# EAGLE board USB_Type_A_Female_Breakout-Panel-v10 (EAGLE 6.6.0)
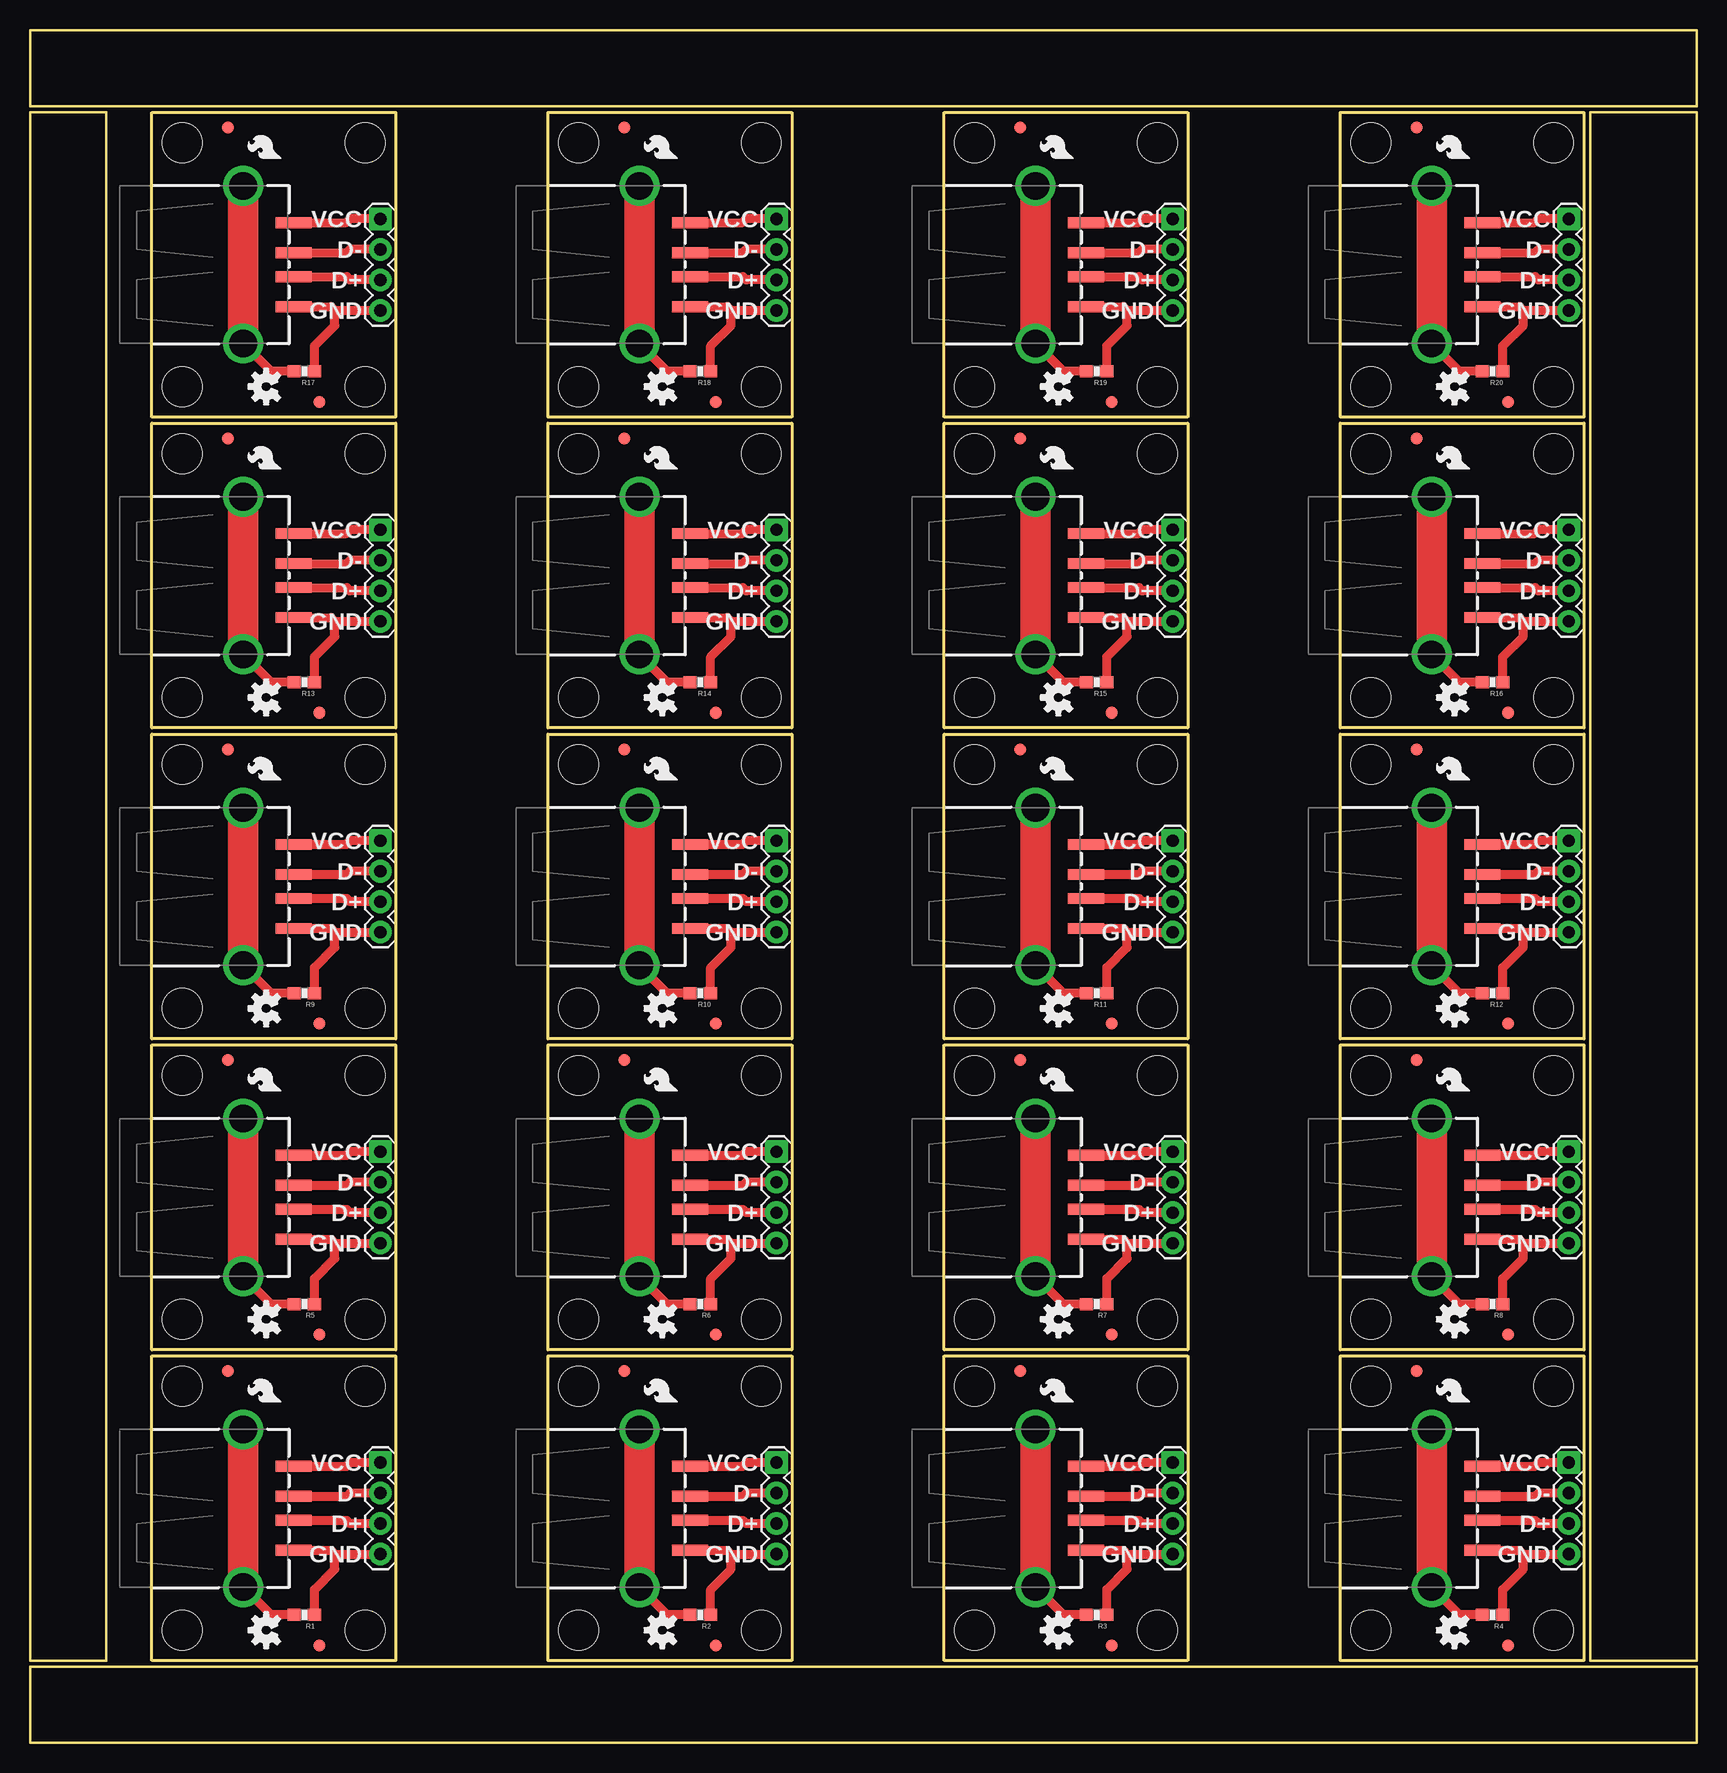
[diagram p0: board, top side]
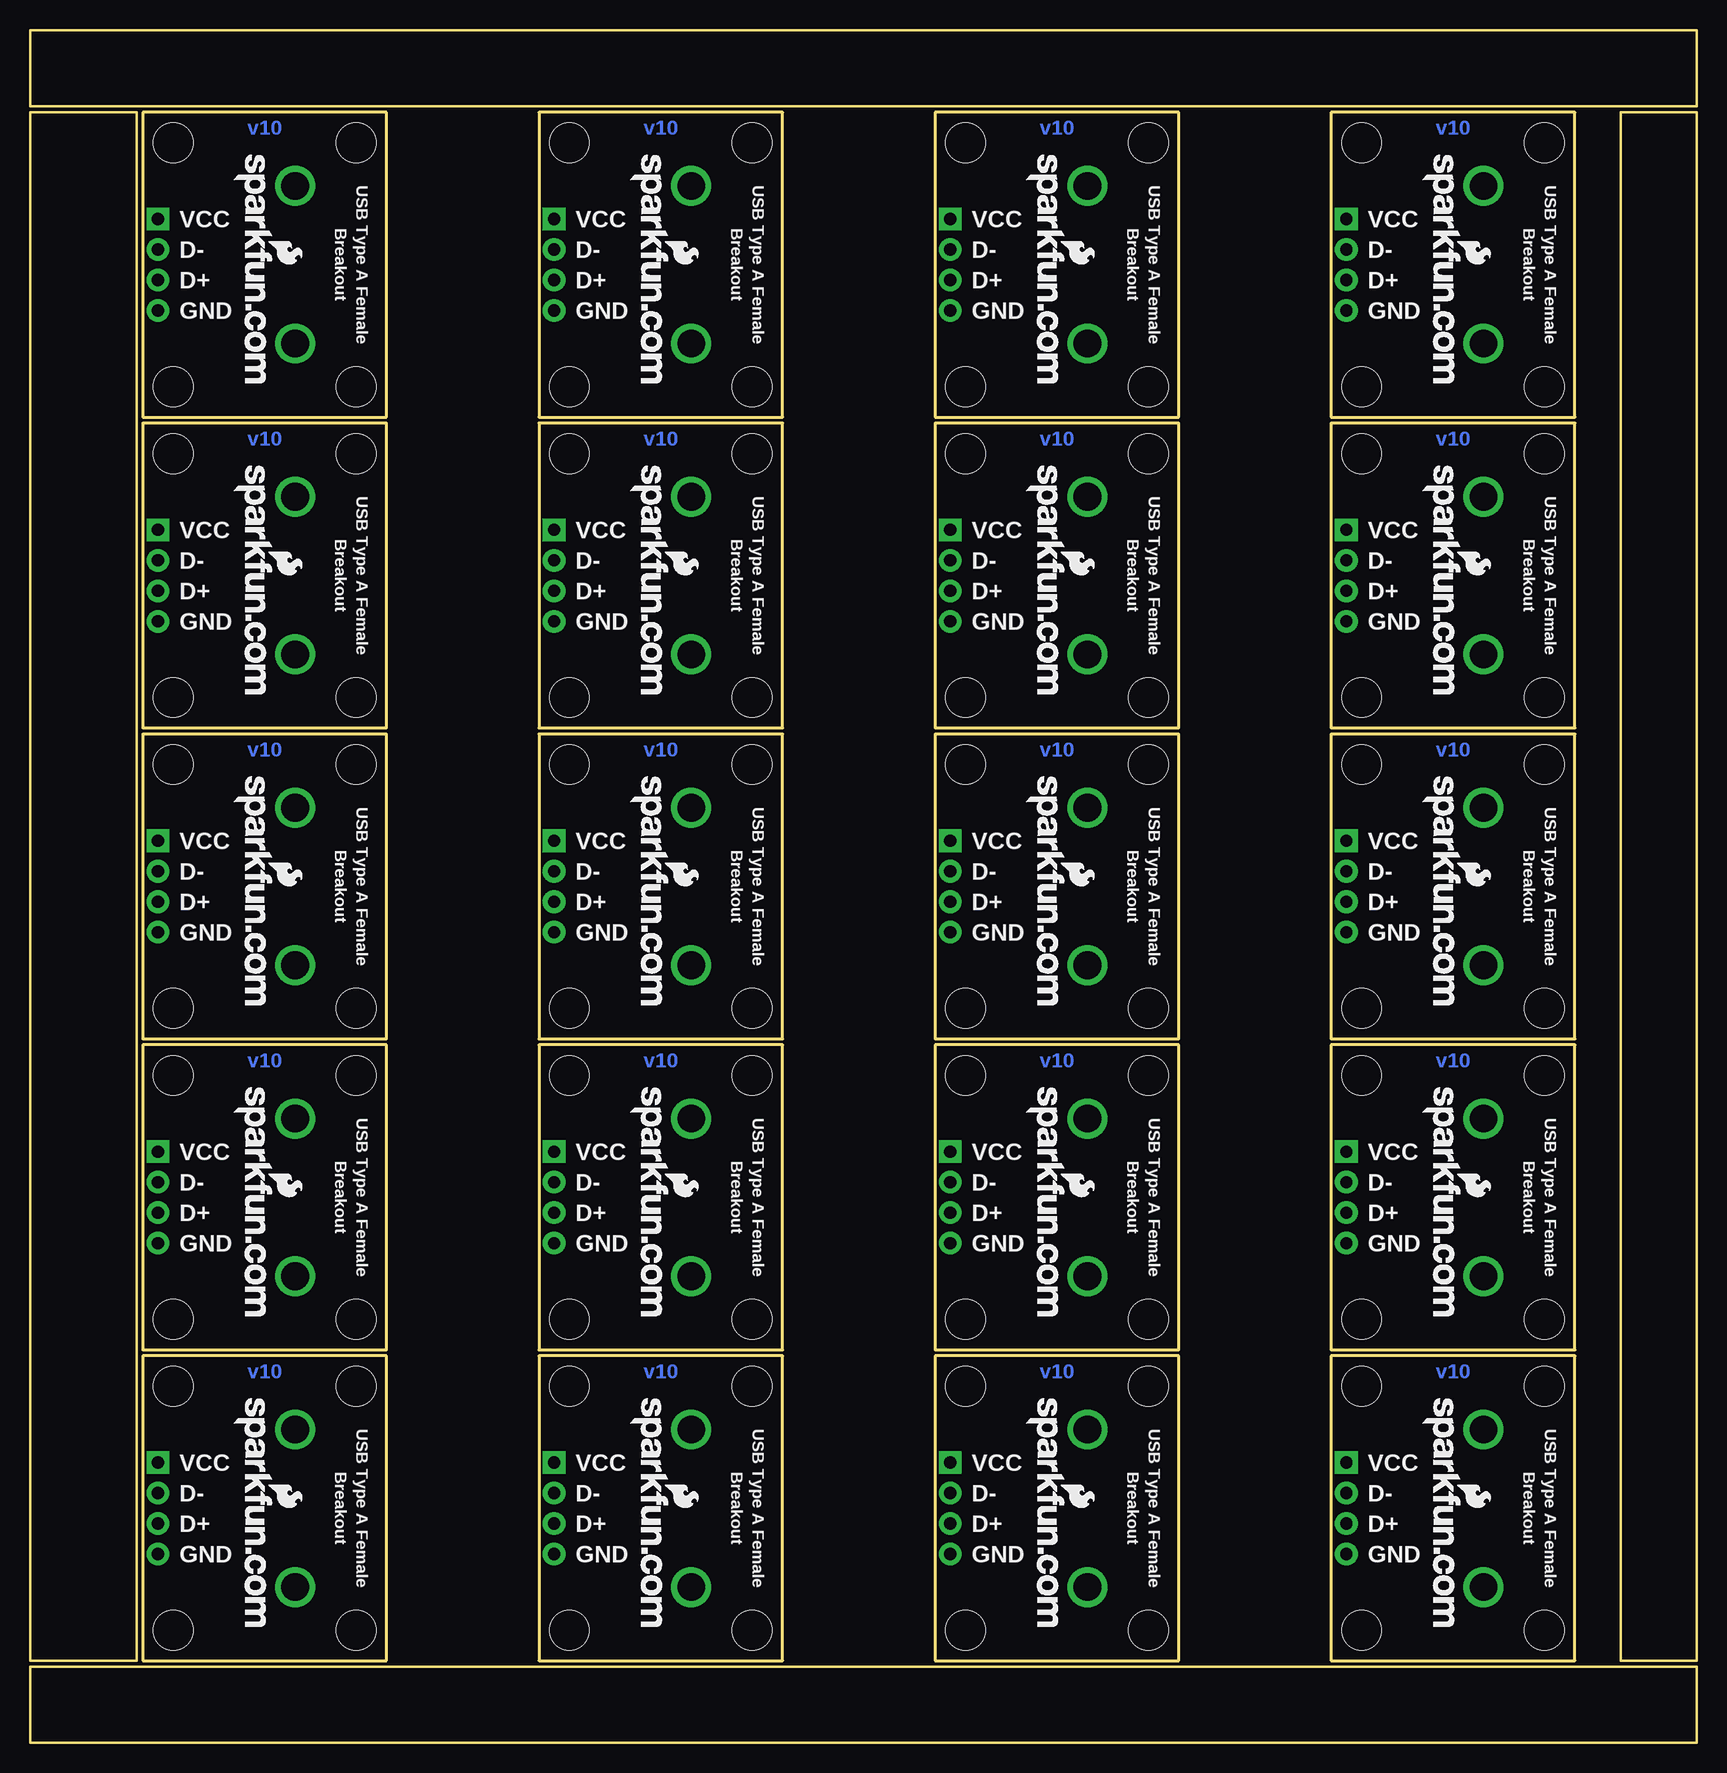
[diagram p1: board, bottom side, seen from below]

Size 138.94 x 142.75 mm. Coordinates in mm from the lower left corner, seen from the top.
Outline: 10.16,6.86 10.16,32.26 30.48,32.26 30.48,6.86 10.16,6.86
Outline: 43.18,6.86 43.18,32.26 63.5,32.26 63.5,6.86 43.18,6.86
Outline: 76.2,6.86 76.2,32.26 96.52,32.26 96.52,6.86 76.2,6.86
Outline: 109.22,6.86 109.22,32.26 129.54,32.26 129.54,6.86 109.22,6.86
Outline: 10.16,32.77 10.16,58.17 30.48,58.17 30.48,32.77 10.16,32.77
Outline: 43.18,32.77 43.18,58.17 63.5,58.17 63.5,32.77 43.18,32.77
Outline: 76.2,32.77 76.2,58.17 96.52,58.17 96.52,32.77 76.2,32.77
Outline: 109.22,32.77 109.22,58.17 129.54,58.17 129.54,32.77 109.22,32.77
Outline: 10.16,58.67 10.16,84.07 30.48,84.07 30.48,58.67 10.16,58.67
Outline: 43.18,58.67 43.18,84.07 63.5,84.07 63.5,58.67 43.18,58.67
Outline: 76.2,58.67 76.2,84.07 96.52,84.07 96.52,58.67 76.2,58.67
Outline: 109.22,58.67 109.22,84.07 129.54,84.07 129.54,58.67 109.22,58.67
Outline: 10.16,84.58 10.16,109.98 30.48,109.98 30.48,84.58 10.16,84.58
Outline: 43.18,84.58 43.18,109.98 63.5,109.98 63.5,84.58 43.18,84.58
Outline: 76.2,84.58 76.2,109.98 96.52,109.98 96.52,84.58 76.2,84.58
Outline: 109.22,84.58 109.22,109.98 129.54,109.98 129.54,84.58 109.22,84.58
Outline: 10.16,110.49 10.16,135.89 30.48,135.89 30.48,110.49 10.16,110.49
Outline: 43.18,110.49 43.18,135.89 63.5,135.89 63.5,110.49 43.18,110.49
Outline: 76.2,110.49 76.2,135.89 96.52,135.89 96.52,110.49 76.2,110.49
Outline: 109.22,110.49 109.22,135.89 129.54,135.89 129.54,110.49 109.22,110.49
Outline: 6.35,6.86 6.35,135.89 0,135.89 0,6.86 6.35,6.86
Outline: 0,0 138.94,0 138.94,6.35 0,6.35 0,0
Outline: 138.94,6.86 138.94,135.89 130.05,135.89 130.05,6.86 138.94,6.86
Outline: 138.94,142.75 0,142.75 0,136.4 138.94,136.4 138.94,142.75
Copper layers (1*16): Top 0.035mm / dielectric 1.5mm / Bottom 0.035mm
Design rules "SparkFun-2-layer": minimum track width 7mil, minimum drill 15mil, track to track 8mil, track to pad 8mil, pad to pad 8mil, via to via 8mil, smd to smd 8mil, copper to edge 8mil, drill to drill 8mil, minimum pad ring 12mil, minimum via ring 10mil, stop-mask expansion 4mil, vias tented up to drill 20mil, thermal gap 10mil

## Footprints (pad centres in the part's own frame; a part is rotated, then mirrored left to right if it is on the bottom)
FIDUCIAL-1X2 = smd 1 x 1: 1 0,0
USB-A-S-NOSILK-FEMALE = smd 3 x 0.9: D+ 4.212,-1; D- 4.212,1; GND 4.212,-3.5; VBUS 4.212,3.5 | drill 2.311: S1 0,-6.566; S2 0,6.566
1X04 = drill 1.016 pad 1.88 square: 1 0,0 | drill 1.016 pad 1.88: 2 2.54,0; 3 5.08,0; 4 7.62,0
0603-RES = smd 1.1 x 1: 1 -0.85,0; 2 0.85,0
STAND-OFF = hole 3.302: 0,0

## Placement (x,y rotation side)
FID1  FIDUCIAL1X2  [FIDUCIAL-1X2]  24.13,8.13 0 top
FID2  FIDUCIAL1X2  [FIDUCIAL-1X2]  16.51,30.99 0 top
FID3  FIDUCIAL1X2  [FIDUCIAL-1X2]  57.15,8.13 0 top
FID4  FIDUCIAL1X2  [FIDUCIAL-1X2]  49.53,30.99 0 top
FID5  FIDUCIAL1X2  [FIDUCIAL-1X2]  90.17,8.13 0 top
FID6  FIDUCIAL1X2  [FIDUCIAL-1X2]  82.55,30.99 0 top
FID7  FIDUCIAL1X2  [FIDUCIAL-1X2]  123.19,8.13 0 top
FID8  FIDUCIAL1X2  [FIDUCIAL-1X2]  115.57,30.99 0 top
FID9  FIDUCIAL1X2  [FIDUCIAL-1X2]  24.13,34.04 0 top
FID10  FIDUCIAL1X2  [FIDUCIAL-1X2]  16.51,56.9 0 top
FID11  FIDUCIAL1X2  [FIDUCIAL-1X2]  57.15,34.04 0 top
FID12  FIDUCIAL1X2  [FIDUCIAL-1X2]  49.53,56.9 0 top
FID13  FIDUCIAL1X2  [FIDUCIAL-1X2]  90.17,34.04 0 top
FID14  FIDUCIAL1X2  [FIDUCIAL-1X2]  82.55,56.9 0 top
FID15  FIDUCIAL1X2  [FIDUCIAL-1X2]  123.19,34.04 0 top
FID16  FIDUCIAL1X2  [FIDUCIAL-1X2]  115.57,56.9 0 top
FID17  FIDUCIAL1X2  [FIDUCIAL-1X2]  24.13,59.94 0 top
FID18  FIDUCIAL1X2  [FIDUCIAL-1X2]  16.51,82.8 0 top
FID19  FIDUCIAL1X2  [FIDUCIAL-1X2]  57.15,59.94 0 top
FID20  FIDUCIAL1X2  [FIDUCIAL-1X2]  49.53,82.8 0 top
FID21  FIDUCIAL1X2  [FIDUCIAL-1X2]  90.17,59.94 0 top
FID22  FIDUCIAL1X2  [FIDUCIAL-1X2]  82.55,82.8 0 top
FID23  FIDUCIAL1X2  [FIDUCIAL-1X2]  123.19,59.94 0 top
FID24  FIDUCIAL1X2  [FIDUCIAL-1X2]  115.57,82.8 0 top
FID25  FIDUCIAL1X2  [FIDUCIAL-1X2]  24.13,85.85 0 top
FID26  FIDUCIAL1X2  [FIDUCIAL-1X2]  16.51,108.71 0 top
FID27  FIDUCIAL1X2  [FIDUCIAL-1X2]  57.15,85.85 0 top
FID28  FIDUCIAL1X2  [FIDUCIAL-1X2]  49.53,108.71 0 top
FID29  FIDUCIAL1X2  [FIDUCIAL-1X2]  90.17,85.85 0 top
FID30  FIDUCIAL1X2  [FIDUCIAL-1X2]  82.55,108.71 0 top
FID31  FIDUCIAL1X2  [FIDUCIAL-1X2]  123.19,85.85 0 top
FID32  FIDUCIAL1X2  [FIDUCIAL-1X2]  115.57,108.71 0 top
FID33  FIDUCIAL1X2  [FIDUCIAL-1X2]  24.13,111.76 0 top
FID34  FIDUCIAL1X2  [FIDUCIAL-1X2]  16.51,134.62 0 top
FID35  FIDUCIAL1X2  [FIDUCIAL-1X2]  57.15,111.76 0 top
FID36  FIDUCIAL1X2  [FIDUCIAL-1X2]  49.53,134.62 0 top
FID37  FIDUCIAL1X2  [FIDUCIAL-1X2]  90.17,111.76 0 top
FID38  FIDUCIAL1X2  [FIDUCIAL-1X2]  82.55,134.62 0 top
FID39  FIDUCIAL1X2  [FIDUCIAL-1X2]  123.19,111.76 0 top
FID40  FIDUCIAL1X2  [FIDUCIAL-1X2]  115.57,134.62 0 top
JP1  USB+SHIELDUSB-A-S-NOSILK-FEMALE  [USB-A-S-NOSILK-FEMALE]  17.78,19.56 0 top
JP2  [1X04]  29.21,23.37 270 top
JP3  USB+SHIELDUSB-A-S-NOSILK-FEMALE  [USB-A-S-NOSILK-FEMALE]  50.8,19.56 0 top
JP4  [1X04]  62.23,23.37 270 top
JP5  USB+SHIELDUSB-A-S-NOSILK-FEMALE  [USB-A-S-NOSILK-FEMALE]  83.82,19.56 0 top
JP6  [1X04]  95.25,23.37 270 top
JP7  USB+SHIELDUSB-A-S-NOSILK-FEMALE  [USB-A-S-NOSILK-FEMALE]  116.84,19.56 0 top
JP8  [1X04]  128.27,23.37 270 top
JP9  USB+SHIELDUSB-A-S-NOSILK-FEMALE  [USB-A-S-NOSILK-FEMALE]  17.78,45.47 0 top
JP10  [1X04]  29.21,49.28 270 top
JP11  USB+SHIELDUSB-A-S-NOSILK-FEMALE  [USB-A-S-NOSILK-FEMALE]  50.8,45.47 0 top
JP12  [1X04]  62.23,49.28 270 top
JP13  USB+SHIELDUSB-A-S-NOSILK-FEMALE  [USB-A-S-NOSILK-FEMALE]  83.82,45.47 0 top
JP14  [1X04]  95.25,49.28 270 top
JP15  USB+SHIELDUSB-A-S-NOSILK-FEMALE  [USB-A-S-NOSILK-FEMALE]  116.84,45.47 0 top
JP16  [1X04]  128.27,49.28 270 top
JP17  USB+SHIELDUSB-A-S-NOSILK-FEMALE  [USB-A-S-NOSILK-FEMALE]  17.78,71.37 0 top
JP18  [1X04]  29.21,75.18 270 top
JP19  USB+SHIELDUSB-A-S-NOSILK-FEMALE  [USB-A-S-NOSILK-FEMALE]  50.8,71.37 0 top
JP20  [1X04]  62.23,75.18 270 top
JP21  USB+SHIELDUSB-A-S-NOSILK-FEMALE  [USB-A-S-NOSILK-FEMALE]  83.82,71.37 0 top
JP22  [1X04]  95.25,75.18 270 top
JP23  USB+SHIELDUSB-A-S-NOSILK-FEMALE  [USB-A-S-NOSILK-FEMALE]  116.84,71.37 0 top
JP24  [1X04]  128.27,75.18 270 top
JP25  USB+SHIELDUSB-A-S-NOSILK-FEMALE  [USB-A-S-NOSILK-FEMALE]  17.78,97.28 0 top
JP26  [1X04]  29.21,101.09 270 top
JP27  USB+SHIELDUSB-A-S-NOSILK-FEMALE  [USB-A-S-NOSILK-FEMALE]  50.8,97.28 0 top
JP28  [1X04]  62.23,101.09 270 top
JP29  USB+SHIELDUSB-A-S-NOSILK-FEMALE  [USB-A-S-NOSILK-FEMALE]  83.82,97.28 0 top
JP30  [1X04]  95.25,101.09 270 top
JP31  USB+SHIELDUSB-A-S-NOSILK-FEMALE  [USB-A-S-NOSILK-FEMALE]  116.84,97.28 0 top
JP32  [1X04]  128.27,101.09 270 top
JP33  USB+SHIELDUSB-A-S-NOSILK-FEMALE  [USB-A-S-NOSILK-FEMALE]  17.78,123.19 0 top
JP34  [1X04]  29.21,127 270 top
JP35  USB+SHIELDUSB-A-S-NOSILK-FEMALE  [USB-A-S-NOSILK-FEMALE]  50.8,123.19 0 top
JP36  [1X04]  62.23,127 270 top
JP37  USB+SHIELDUSB-A-S-NOSILK-FEMALE  [USB-A-S-NOSILK-FEMALE]  83.82,123.19 0 top
JP38  [1X04]  95.25,127 270 top
JP39  USB+SHIELDUSB-A-S-NOSILK-FEMALE  [USB-A-S-NOSILK-FEMALE]  116.84,123.19 0 top
JP40  [1X04]  128.27,127 270 top
LOGO1  LOGO-SFENEW  [SFE-NEW-WEBLOGO]  22.86,28.7 270 bottom
LOGO2  OSHW-LOGOS  [OSHW-LOGO-S]  19.68,9.4 90 top
LOGO3  LOGO-SFESK  [SFE-LOGO-FLAME]  20.95,28.45 90 top
LOGO4  LOGO-SFENEW  [SFE-NEW-WEBLOGO]  55.88,28.7 270 bottom
LOGO5  OSHW-LOGOS  [OSHW-LOGO-S]  52.7,9.4 90 top
LOGO6  LOGO-SFESK  [SFE-LOGO-FLAME]  53.98,28.45 90 top
LOGO7  LOGO-SFENEW  [SFE-NEW-WEBLOGO]  88.9,28.7 270 bottom
LOGO8  OSHW-LOGOS  [OSHW-LOGO-S]  85.72,9.4 90 top
LOGO9  LOGO-SFESK  [SFE-LOGO-FLAME]  87,28.45 90 top
LOGO10  LOGO-SFENEW  [SFE-NEW-WEBLOGO]  121.92,28.7 270 bottom
LOGO11  OSHW-LOGOS  [OSHW-LOGO-S]  118.75,9.4 90 top
LOGO12  LOGO-SFESK  [SFE-LOGO-FLAME]  120.02,28.45 90 top
LOGO13  LOGO-SFENEW  [SFE-NEW-WEBLOGO]  22.86,54.61 270 bottom
LOGO14  OSHW-LOGOS  [OSHW-LOGO-S]  19.68,35.31 90 top
LOGO15  LOGO-SFESK  [SFE-LOGO-FLAME]  20.95,54.36 90 top
LOGO16  LOGO-SFENEW  [SFE-NEW-WEBLOGO]  55.88,54.61 270 bottom
LOGO17  OSHW-LOGOS  [OSHW-LOGO-S]  52.7,35.31 90 top
LOGO18  LOGO-SFESK  [SFE-LOGO-FLAME]  53.98,54.36 90 top
LOGO19  LOGO-SFENEW  [SFE-NEW-WEBLOGO]  88.9,54.61 270 bottom
LOGO20  OSHW-LOGOS  [OSHW-LOGO-S]  85.72,35.31 90 top
LOGO21  LOGO-SFESK  [SFE-LOGO-FLAME]  87,54.36 90 top
LOGO22  LOGO-SFENEW  [SFE-NEW-WEBLOGO]  121.92,54.61 270 bottom
LOGO23  OSHW-LOGOS  [OSHW-LOGO-S]  118.75,35.31 90 top
LOGO24  LOGO-SFESK  [SFE-LOGO-FLAME]  120.02,54.36 90 top
LOGO25  LOGO-SFENEW  [SFE-NEW-WEBLOGO]  22.86,80.52 270 bottom
LOGO26  OSHW-LOGOS  [OSHW-LOGO-S]  19.68,61.21 90 top
LOGO27  LOGO-SFESK  [SFE-LOGO-FLAME]  20.95,80.26 90 top
LOGO28  LOGO-SFENEW  [SFE-NEW-WEBLOGO]  55.88,80.52 270 bottom
LOGO29  OSHW-LOGOS  [OSHW-LOGO-S]  52.7,61.21 90 top
LOGO30  LOGO-SFESK  [SFE-LOGO-FLAME]  53.98,80.26 90 top
LOGO31  LOGO-SFENEW  [SFE-NEW-WEBLOGO]  88.9,80.52 270 bottom
LOGO32  OSHW-LOGOS  [OSHW-LOGO-S]  85.72,61.21 90 top
LOGO33  LOGO-SFESK  [SFE-LOGO-FLAME]  87,80.26 90 top
LOGO34  LOGO-SFENEW  [SFE-NEW-WEBLOGO]  121.92,80.52 270 bottom
LOGO35  OSHW-LOGOS  [OSHW-LOGO-S]  118.75,61.21 90 top
LOGO36  LOGO-SFESK  [SFE-LOGO-FLAME]  120.02,80.26 90 top
LOGO37  LOGO-SFENEW  [SFE-NEW-WEBLOGO]  22.86,106.43 270 bottom
LOGO38  OSHW-LOGOS  [OSHW-LOGO-S]  19.68,87.12 90 top
LOGO39  LOGO-SFESK  [SFE-LOGO-FLAME]  20.95,106.17 90 top
LOGO40  LOGO-SFENEW  [SFE-NEW-WEBLOGO]  55.88,106.43 270 bottom
LOGO41  OSHW-LOGOS  [OSHW-LOGO-S]  52.7,87.12 90 top
LOGO42  LOGO-SFESK  [SFE-LOGO-FLAME]  53.98,106.17 90 top
LOGO43  LOGO-SFENEW  [SFE-NEW-WEBLOGO]  88.9,106.43 270 bottom
LOGO44  OSHW-LOGOS  [OSHW-LOGO-S]  85.72,87.12 90 top
LOGO45  LOGO-SFESK  [SFE-LOGO-FLAME]  87,106.17 90 top
LOGO46  LOGO-SFENEW  [SFE-NEW-WEBLOGO]  121.92,106.43 270 bottom
LOGO47  OSHW-LOGOS  [OSHW-LOGO-S]  118.75,87.12 90 top
LOGO48  LOGO-SFESK  [SFE-LOGO-FLAME]  120.02,106.17 90 top
LOGO49  LOGO-SFENEW  [SFE-NEW-WEBLOGO]  22.86,132.33 270 bottom
LOGO50  OSHW-LOGOS  [OSHW-LOGO-S]  19.68,113.03 90 top
LOGO51  LOGO-SFESK  [SFE-LOGO-FLAME]  20.95,132.08 90 top
LOGO52  LOGO-SFENEW  [SFE-NEW-WEBLOGO]  55.88,132.33 270 bottom
LOGO53  OSHW-LOGOS  [OSHW-LOGO-S]  52.7,113.03 90 top
LOGO54  LOGO-SFESK  [SFE-LOGO-FLAME]  53.98,132.08 90 top
LOGO55  LOGO-SFENEW  [SFE-NEW-WEBLOGO]  88.9,132.33 270 bottom
LOGO56  OSHW-LOGOS  [OSHW-LOGO-S]  85.72,113.03 90 top
LOGO57  LOGO-SFESK  [SFE-LOGO-FLAME]  87,132.08 90 top
LOGO58  LOGO-SFENEW  [SFE-NEW-WEBLOGO]  121.92,132.33 270 bottom
LOGO59  OSHW-LOGOS  [OSHW-LOGO-S]  118.75,113.03 90 top
LOGO60  LOGO-SFESK  [SFE-LOGO-FLAME]  120.02,132.08 90 top
R1  0  [0603-RES]  22.86,10.67 180 top
R2  0  [0603-RES]  55.88,10.67 180 top
R3  0  [0603-RES]  88.9,10.67 180 top
R4  0  [0603-RES]  121.92,10.67 180 top
R5  0  [0603-RES]  22.86,36.58 180 top
R6  0  [0603-RES]  55.88,36.58 180 top
R7  0  [0603-RES]  88.9,36.58 180 top
R8  0  [0603-RES]  121.92,36.58 180 top
R9  0  [0603-RES]  22.86,62.48 180 top
R10  0  [0603-RES]  55.88,62.48 180 top
R11  0  [0603-RES]  88.9,62.48 180 top
R12  0  [0603-RES]  121.92,62.48 180 top
R13  0  [0603-RES]  22.86,88.39 180 top
R14  0  [0603-RES]  55.88,88.39 180 top
R15  0  [0603-RES]  88.9,88.39 180 top
R16  0  [0603-RES]  121.92,88.39 180 top
R17  0  [0603-RES]  22.86,114.3 180 top
R18  0  [0603-RES]  55.88,114.3 180 top
R19  0  [0603-RES]  88.9,114.3 180 top
R20  0  [0603-RES]  121.92,114.3 180 top
STANDOFF1  STAND-OFF  [STAND-OFF]  12.7,29.72 0 top
STANDOFF2  STAND-OFF  [STAND-OFF]  12.7,9.4 0 top
STANDOFF3  STAND-OFF  [STAND-OFF]  27.94,29.72 0 top
STANDOFF4  STAND-OFF  [STAND-OFF]  27.94,9.4 0 top
STANDOFF5  STAND-OFF  [STAND-OFF]  45.72,29.72 0 top
STANDOFF6  STAND-OFF  [STAND-OFF]  45.72,9.4 0 top
STANDOFF7  STAND-OFF  [STAND-OFF]  60.96,29.72 0 top
STANDOFF8  STAND-OFF  [STAND-OFF]  60.96,9.4 0 top
STANDOFF9  STAND-OFF  [STAND-OFF]  78.74,29.72 0 top
STANDOFF10  STAND-OFF  [STAND-OFF]  78.74,9.4 0 top
STANDOFF11  STAND-OFF  [STAND-OFF]  93.98,29.72 0 top
STANDOFF12  STAND-OFF  [STAND-OFF]  93.98,9.4 0 top
STANDOFF13  STAND-OFF  [STAND-OFF]  111.76,29.72 0 top
STANDOFF14  STAND-OFF  [STAND-OFF]  111.76,9.4 0 top
STANDOFF15  STAND-OFF  [STAND-OFF]  127,29.72 0 top
STANDOFF16  STAND-OFF  [STAND-OFF]  127,9.4 0 top
STANDOFF17  STAND-OFF  [STAND-OFF]  12.7,55.63 0 top
STANDOFF18  STAND-OFF  [STAND-OFF]  12.7,35.31 0 top
STANDOFF19  STAND-OFF  [STAND-OFF]  27.94,55.63 0 top
STANDOFF20  STAND-OFF  [STAND-OFF]  27.94,35.31 0 top
STANDOFF21  STAND-OFF  [STAND-OFF]  45.72,55.63 0 top
STANDOFF22  STAND-OFF  [STAND-OFF]  45.72,35.31 0 top
STANDOFF23  STAND-OFF  [STAND-OFF]  60.96,55.63 0 top
STANDOFF24  STAND-OFF  [STAND-OFF]  60.96,35.31 0 top
STANDOFF25  STAND-OFF  [STAND-OFF]  78.74,55.63 0 top
STANDOFF26  STAND-OFF  [STAND-OFF]  78.74,35.31 0 top
STANDOFF27  STAND-OFF  [STAND-OFF]  93.98,55.63 0 top
STANDOFF28  STAND-OFF  [STAND-OFF]  93.98,35.31 0 top
STANDOFF29  STAND-OFF  [STAND-OFF]  111.76,55.63 0 top
STANDOFF30  STAND-OFF  [STAND-OFF]  111.76,35.31 0 top
STANDOFF31  STAND-OFF  [STAND-OFF]  127,55.63 0 top
STANDOFF32  STAND-OFF  [STAND-OFF]  127,35.31 0 top
STANDOFF33  STAND-OFF  [STAND-OFF]  12.7,81.53 0 top
STANDOFF34  STAND-OFF  [STAND-OFF]  12.7,61.21 0 top
STANDOFF35  STAND-OFF  [STAND-OFF]  27.94,81.53 0 top
STANDOFF36  STAND-OFF  [STAND-OFF]  27.94,61.21 0 top
STANDOFF37  STAND-OFF  [STAND-OFF]  45.72,81.53 0 top
STANDOFF38  STAND-OFF  [STAND-OFF]  45.72,61.21 0 top
STANDOFF39  STAND-OFF  [STAND-OFF]  60.96,81.53 0 top
STANDOFF40  STAND-OFF  [STAND-OFF]  60.96,61.21 0 top
STANDOFF41  STAND-OFF  [STAND-OFF]  78.74,81.53 0 top
STANDOFF42  STAND-OFF  [STAND-OFF]  78.74,61.21 0 top
STANDOFF43  STAND-OFF  [STAND-OFF]  93.98,81.53 0 top
STANDOFF44  STAND-OFF  [STAND-OFF]  93.98,61.21 0 top
STANDOFF45  STAND-OFF  [STAND-OFF]  111.76,81.53 0 top
STANDOFF46  STAND-OFF  [STAND-OFF]  111.76,61.21 0 top
STANDOFF47  STAND-OFF  [STAND-OFF]  127,81.53 0 top
STANDOFF48  STAND-OFF  [STAND-OFF]  127,61.21 0 top
STANDOFF49  STAND-OFF  [STAND-OFF]  12.7,107.44 0 top
STANDOFF50  STAND-OFF  [STAND-OFF]  12.7,87.12 0 top
STANDOFF51  STAND-OFF  [STAND-OFF]  27.94,107.44 0 top
STANDOFF52  STAND-OFF  [STAND-OFF]  27.94,87.12 0 top
STANDOFF53  STAND-OFF  [STAND-OFF]  45.72,107.44 0 top
STANDOFF54  STAND-OFF  [STAND-OFF]  45.72,87.12 0 top
STANDOFF55  STAND-OFF  [STAND-OFF]  60.96,107.44 0 top
STANDOFF56  STAND-OFF  [STAND-OFF]  60.96,87.12 0 top
STANDOFF57  STAND-OFF  [STAND-OFF]  78.74,107.44 0 top
STANDOFF58  STAND-OFF  [STAND-OFF]  78.74,87.12 0 top
STANDOFF59  STAND-OFF  [STAND-OFF]  93.98,107.44 0 top
STANDOFF60  STAND-OFF  [STAND-OFF]  93.98,87.12 0 top
STANDOFF61  STAND-OFF  [STAND-OFF]  111.76,107.44 0 top
STANDOFF62  STAND-OFF  [STAND-OFF]  111.76,87.12 0 top
STANDOFF63  STAND-OFF  [STAND-OFF]  127,107.44 0 top
STANDOFF64  STAND-OFF  [STAND-OFF]  127,87.12 0 top
STANDOFF65  STAND-OFF  [STAND-OFF]  12.7,133.35 0 top
STANDOFF66  STAND-OFF  [STAND-OFF]  12.7,113.03 0 top
STANDOFF67  STAND-OFF  [STAND-OFF]  27.94,133.35 0 top
STANDOFF68  STAND-OFF  [STAND-OFF]  27.94,113.03 0 top
STANDOFF69  STAND-OFF  [STAND-OFF]  45.72,133.35 0 top
STANDOFF70  STAND-OFF  [STAND-OFF]  45.72,113.03 0 top
STANDOFF71  STAND-OFF  [STAND-OFF]  60.96,133.35 0 top
STANDOFF72  STAND-OFF  [STAND-OFF]  60.96,113.03 0 top
STANDOFF73  STAND-OFF  [STAND-OFF]  78.74,133.35 0 top
STANDOFF74  STAND-OFF  [STAND-OFF]  78.74,113.03 0 top
STANDOFF75  STAND-OFF  [STAND-OFF]  93.98,133.35 0 top
STANDOFF76  STAND-OFF  [STAND-OFF]  93.98,113.03 0 top
STANDOFF77  STAND-OFF  [STAND-OFF]  111.76,133.35 0 top
STANDOFF78  STAND-OFF  [STAND-OFF]  111.76,113.03 0 top
STANDOFF79  STAND-OFF  [STAND-OFF]  127,133.35 0 top
STANDOFF80  STAND-OFF  [STAND-OFF]  127,113.03 0 top

## Library data of the parts
FID1-FID40 LOGO1-LOGO60 = SparkFun-Aesthetics
JP1-JP40 = SparkFun-Connectors
R1-R20 = SparkFun-Resistors; PLACE: DNP
STANDOFF1-STANDOFF80 = SparkFun-Electromechanical

## Nets
D+: JP1.D+ JP2.3
D+1: JP3.D+ JP4.3
D+2: JP5.D+ JP6.3
D+3: JP7.D+ JP8.3
D+4: JP9.D+ JP10.3
D+5: JP11.D+ JP12.3
D+6: JP13.D+ JP14.3
D+7: JP15.D+ JP16.3
D+8: JP17.D+ JP18.3
D+9: JP19.D+ JP20.3
D+10: JP21.D+ JP22.3
D+11: JP23.D+ JP24.3
D+12: JP25.D+ JP26.3
D+13: JP27.D+ JP28.3
D+14: JP29.D+ JP30.3
D+15: JP31.D+ JP32.3
D+16: JP33.D+ JP34.3
D+17: JP35.D+ JP36.3
D+18: JP37.D+ JP38.3
D+19: JP39.D+ JP40.3
D-: JP1.D- JP2.2
D-1: JP3.D- JP4.2
D-2: JP5.D- JP6.2
D-3: JP7.D- JP8.2
D-4: JP9.D- JP10.2
D-5: JP11.D- JP12.2
D-6: JP13.D- JP14.2
D-7: JP15.D- JP16.2
D-8: JP17.D- JP18.2
D-9: JP19.D- JP20.2
D-10: JP21.D- JP22.2
D-11: JP23.D- JP24.2
D-12: JP25.D- JP26.2
D-13: JP27.D- JP28.2
D-14: JP29.D- JP30.2
D-15: JP31.D- JP32.2
D-16: JP33.D- JP34.2
D-17: JP35.D- JP36.2
D-18: JP37.D- JP38.2
D-19: JP39.D- JP40.2
GND: JP1.GND JP2.4 R1.1
GND1: JP3.GND JP4.4 R2.1
GND2: JP5.GND JP6.4 R3.1
GND3: JP7.GND JP8.4 R4.1
GND4: JP9.GND JP10.4 R5.1
GND5: JP11.GND JP12.4 R6.1
GND6: JP13.GND JP14.4 R7.1
GND7: JP15.GND JP16.4 R8.1
GND8: JP17.GND JP18.4 R9.1
GND9: JP19.GND JP20.4 R10.1
GND10: JP21.GND JP22.4 R11.1
GND11: JP23.GND JP24.4 R12.1
GND12: JP25.GND JP26.4 R13.1
GND13: JP27.GND JP28.4 R14.1
GND14: JP29.GND JP30.4 R15.1
GND15: JP31.GND JP32.4 R16.1
GND16: JP33.GND JP34.4 R17.1
GND17: JP35.GND JP36.4 R18.1
GND18: JP37.GND JP38.4 R19.1
GND19: JP39.GND JP40.4 R20.1
N$1: JP1.S1 JP1.S2 R1.2
N$2: JP3.S1 JP3.S2 R2.2
N$3: JP5.S1 JP5.S2 R3.2
N$4: JP7.S1 JP7.S2 R4.2
N$5: JP9.S1 JP9.S2 R5.2
N$6: JP11.S1 JP11.S2 R6.2
N$7: JP13.S1 JP13.S2 R7.2
N$8: JP15.S1 JP15.S2 R8.2
N$9: JP17.S1 JP17.S2 R9.2
N$10: JP19.S1 JP19.S2 R10.2
N$11: JP21.S1 JP21.S2 R11.2
N$12: JP23.S1 JP23.S2 R12.2
N$13: JP25.S1 JP25.S2 R13.2
N$14: JP27.S1 JP27.S2 R14.2
N$15: JP29.S1 JP29.S2 R15.2
N$16: JP31.S1 JP31.S2 R16.2
N$17: JP33.S1 JP33.S2 R17.2
N$18: JP35.S1 JP35.S2 R18.2
N$19: JP37.S1 JP37.S2 R19.2
N$20: JP39.S1 JP39.S2 R20.2
VCC: JP1.VBUS JP2.1
VCC1: JP3.VBUS JP4.1
VCC2: JP5.VBUS JP6.1
VCC3: JP7.VBUS JP8.1
VCC4: JP9.VBUS JP10.1
VCC5: JP11.VBUS JP12.1
VCC6: JP13.VBUS JP14.1
VCC7: JP15.VBUS JP16.1
VCC8: JP17.VBUS JP18.1
VCC9: JP19.VBUS JP20.1
VCC10: JP21.VBUS JP22.1
VCC11: JP23.VBUS JP24.1
VCC12: JP25.VBUS JP26.1
VCC13: JP27.VBUS JP28.1
VCC14: JP29.VBUS JP30.1
VCC15: JP31.VBUS JP32.1
VCC16: JP33.VBUS JP34.1
VCC17: JP35.VBUS JP36.1
VCC18: JP37.VBUS JP38.1
VCC19: JP39.VBUS JP40.1

## Tracks (layer width: path | path; a pad name or v marks a point on that pad's centre or on a via)
D+
  Top 0.762: JP1.D+ 26.4,18.56 26.67,18.29 JP2.3
D+1
  Top 0.762: JP3.D+ 59.42,18.56 59.69,18.29 JP4.3
D+2
  Top 0.762: JP5.D+ 92.44,18.56 92.71,18.29 JP6.3
D+3
  Top 0.762: JP7.D+ 125.46,18.56 125.73,18.29 JP8.3
D+4
  Top 0.762: JP9.D+ 26.4,44.47 26.67,44.2 JP10.3
D+5
  Top 0.762: JP11.D+ 59.42,44.47 59.69,44.2 JP12.3
D+6
  Top 0.762: JP13.D+ 92.44,44.47 92.71,44.2 JP14.3
D+7
  Top 0.762: JP15.D+ 125.46,44.47 125.73,44.2 JP16.3
D+8
  Top 0.762: JP17.D+ 26.4,70.37 26.67,70.1 JP18.3
D+9
  Top 0.762: JP19.D+ 59.42,70.37 59.69,70.1 JP20.3
D+10
  Top 0.762: JP21.D+ 92.44,70.37 92.71,70.1 JP22.3
D+11
  Top 0.762: JP23.D+ 125.46,70.37 125.73,70.1 JP24.3
D+12
  Top 0.762: JP25.D+ 26.4,96.28 26.67,96.01 JP26.3
D+13
  Top 0.762: JP27.D+ 59.42,96.28 59.69,96.01 JP28.3
D+14
  Top 0.762: JP29.D+ 92.44,96.28 92.71,96.01 JP30.3
D+15
  Top 0.762: JP31.D+ 125.46,96.28 125.73,96.01 JP32.3
D+16
  Top 0.762: JP33.D+ 26.4,122.19 26.67,121.92 JP34.3
D+17
  Top 0.762: JP35.D+ 59.42,122.19 59.69,121.92 JP36.3
D+18
  Top 0.762: JP37.D+ 92.44,122.19 92.71,121.92 JP38.3
D+19
  Top 0.762: JP39.D+ 125.46,122.19 125.73,121.92 JP40.3
D-
  Top 0.762: JP1.D- 26.4,20.56 26.67,20.83 JP2.2
D-1
  Top 0.762: JP3.D- 59.42,20.56 59.69,20.83 JP4.2
D-2
  Top 0.762: JP5.D- 92.44,20.56 92.71,20.83 JP6.2
D-3
  Top 0.762: JP7.D- 125.46,20.56 125.73,20.83 JP8.2
D-4
  Top 0.762: JP9.D- 26.4,46.47 26.67,46.74 JP10.2
D-5
  Top 0.762: JP11.D- 59.42,46.47 59.69,46.74 JP12.2
D-6
  Top 0.762: JP13.D- 92.44,46.47 92.71,46.74 JP14.2
D-7
  Top 0.762: JP15.D- 125.46,46.47 125.73,46.74 JP16.2
D-8
  Top 0.762: JP17.D- 26.4,72.37 26.67,72.64 JP18.2
D-9
  Top 0.762: JP19.D- 59.42,72.37 59.69,72.64 JP20.2
D-10
  Top 0.762: JP21.D- 92.44,72.37 92.71,72.64 JP22.2
D-11
  Top 0.762: JP23.D- 125.46,72.37 125.73,72.64 JP24.2
D-12
  Top 0.762: JP25.D- 26.4,98.28 26.67,98.55 JP26.2
D-13
  Top 0.762: JP27.D- 59.42,98.28 59.69,98.55 JP28.2
D-14
  Top 0.762: JP29.D- 92.44,98.28 92.71,98.55 JP30.2
D-15
  Top 0.762: JP31.D- 125.46,98.28 125.73,98.55 JP32.2
D-16
  Top 0.762: JP33.D- 26.4,124.19 26.67,124.46 JP34.2
D-17
  Top 0.762: JP35.D- 59.42,124.19 59.69,124.46 JP36.2
D-18
  Top 0.762: JP37.D- 92.44,124.19 92.71,124.46 JP38.2
D-19
  Top 0.762: JP39.D- 125.46,124.19 125.73,124.46 JP40.2
GND
  Top 0.762: R1.1 23.71,12.79 25.4,14.48 25.4,15.75 | JP1.GND 25.09,16.06 25.4,15.75 | 25.4,15.75 JP2.4
GND1
  Top 0.762: R2.1 56.73,12.79 58.42,14.48 58.42,15.75 | JP3.GND 58.11,16.06 58.42,15.75 | 58.42,15.75 JP4.4
GND2
  Top 0.762: R3.1 89.75,12.79 91.44,14.48 91.44,15.75 | JP5.GND 91.13,16.06 91.44,15.75 | 91.44,15.75 JP6.4
GND3
  Top 0.762: R4.1 122.77,12.79 124.46,14.48 124.46,15.75 | JP7.GND 124.15,16.06 124.46,15.75 | 124.46,15.75 JP8.4
GND4
  Top 0.762: R5.1 23.71,38.7 25.4,40.39 25.4,41.66 | JP9.GND 25.09,41.97 25.4,41.66 | 25.4,41.66 JP10.4
GND5
  Top 0.762: R6.1 56.73,38.7 58.42,40.39 58.42,41.66 | JP11.GND 58.11,41.97 58.42,41.66 | 58.42,41.66 JP12.4
GND6
  Top 0.762: R7.1 89.75,38.7 91.44,40.39 91.44,41.66 | JP13.GND 91.13,41.97 91.44,41.66 | 91.44,41.66 JP14.4
GND7
  Top 0.762: R8.1 122.77,38.7 124.46,40.39 124.46,41.66 | JP15.GND 124.15,41.97 124.46,41.66 | 124.46,41.66 JP16.4
GND8
  Top 0.762: R9.1 23.71,64.6 25.4,66.29 25.4,67.56 | JP17.GND 25.09,67.87 25.4,67.56 | 25.4,67.56 JP18.4
GND9
  Top 0.762: R10.1 56.73,64.6 58.42,66.29 58.42,67.56 | JP19.GND 58.11,67.87 58.42,67.56 | 58.42,67.56 JP20.4
GND10
  Top 0.762: R11.1 89.75,64.6 91.44,66.29 91.44,67.56 | JP21.GND 91.13,67.87 91.44,67.56 | 91.44,67.56 JP22.4
GND11
  Top 0.762: R12.1 122.77,64.6 124.46,66.29 124.46,67.56 | JP23.GND 124.15,67.87 124.46,67.56 | 124.46,67.56 JP24.4
GND12
  Top 0.762: R13.1 23.71,90.51 25.4,92.2 25.4,93.47 | JP25.GND 25.09,93.78 25.4,93.47 | 25.4,93.47 JP26.4
GND13
  Top 0.762: R14.1 56.73,90.51 58.42,92.2 58.42,93.47 | JP27.GND 58.11,93.78 58.42,93.47 | 58.42,93.47 JP28.4
GND14
  Top 0.762: R15.1 89.75,90.51 91.44,92.2 91.44,93.47 | JP29.GND 91.13,93.78 91.44,93.47 | 91.44,93.47 JP30.4
GND15
  Top 0.762: R16.1 122.77,90.51 124.46,92.2 124.46,93.47 | JP31.GND 124.15,93.78 124.46,93.47 | 124.46,93.47 JP32.4
GND16
  Top 0.762: R17.1 23.71,116.42 25.4,118.11 25.4,119.38 | JP33.GND 25.09,119.69 25.4,119.38 | 25.4,119.38 JP34.4
GND17
  Top 0.762: R18.1 56.73,116.42 58.42,118.11 58.42,119.38 | JP35.GND 58.11,119.69 58.42,119.38 | 58.42,119.38 JP36.4
GND18
  Top 0.762: R19.1 89.75,116.42 91.44,118.11 91.44,119.38 | JP37.GND 91.13,119.69 91.44,119.38 | 91.44,119.38 JP38.4
GND19
  Top 0.762: R20.1 122.77,116.42 124.46,118.11 124.46,119.38 | JP39.GND 124.15,119.69 124.46,119.38 | 124.46,119.38 JP40.4
N$1
  Top 0.762: R1.2 20.1,10.67 JP1.S1
  Top 2.54: JP1.S2 JP1.S1
N$2
  Top 0.762: R2.2 53.12,10.67 JP3.S1
  Top 2.54: JP3.S2 JP3.S1
N$3
  Top 0.762: R3.2 86.14,10.67 JP5.S1
  Top 2.54: JP5.S2 JP5.S1
N$4
  Top 0.762: R4.2 119.16,10.67 JP7.S1
  Top 2.54: JP7.S2 JP7.S1
N$5
  Top 0.762: R5.2 20.1,36.58 JP9.S1
  Top 2.54: JP9.S2 JP9.S1
N$6
  Top 0.762: R6.2 53.12,36.58 JP11.S1
  Top 2.54: JP11.S2 JP11.S1
N$7
  Top 0.762: R7.2 86.14,36.58 JP13.S1
  Top 2.54: JP13.S2 JP13.S1
N$8
  Top 0.762: R8.2 119.16,36.58 JP15.S1
  Top 2.54: JP15.S2 JP15.S1
N$9
  Top 0.762: R9.2 20.1,62.48 JP17.S1
  Top 2.54: JP17.S2 JP17.S1
N$10
  Top 0.762: R10.2 53.12,62.48 JP19.S1
  Top 2.54: JP19.S2 JP19.S1
N$11
  Top 0.762: R11.2 86.14,62.48 JP21.S1
  Top 2.54: JP21.S2 JP21.S1
N$12
  Top 0.762: R12.2 119.16,62.48 JP23.S1
  Top 2.54: JP23.S2 JP23.S1
N$13
  Top 0.762: R13.2 20.1,88.39 JP25.S1
  Top 2.54: JP25.S2 JP25.S1
N$14
  Top 0.762: R14.2 53.12,88.39 JP27.S1
  Top 2.54: JP27.S2 JP27.S1
N$15
  Top 0.762: R15.2 86.14,88.39 JP29.S1
  Top 2.54: JP29.S2 JP29.S1
N$16
  Top 0.762: R16.2 119.16,88.39 JP31.S1
  Top 2.54: JP31.S2 JP31.S1
N$17
  Top 0.762: R17.2 20.1,114.3 JP33.S1
  Top 2.54: JP33.S2 JP33.S1
N$18
  Top 0.762: R18.2 53.12,114.3 JP35.S1
  Top 2.54: JP35.S2 JP35.S1
N$19
  Top 0.762: R19.2 86.14,114.3 JP37.S1
  Top 2.54: JP37.S2 JP37.S1
N$20
  Top 0.762: R20.2 119.16,114.3 JP39.S1
  Top 2.54: JP39.S2 JP39.S1
VCC
  Top 0.762: JP1.VBUS 26.36,23.06 26.67,23.37 JP2.1
VCC1
  Top 0.762: JP3.VBUS 59.38,23.06 59.69,23.37 JP4.1
VCC2
  Top 0.762: JP5.VBUS 92.4,23.06 92.71,23.37 JP6.1
VCC3
  Top 0.762: JP7.VBUS 125.42,23.06 125.73,23.37 JP8.1
VCC4
  Top 0.762: JP9.VBUS 26.36,48.97 26.67,49.28 JP10.1
VCC5
  Top 0.762: JP11.VBUS 59.38,48.97 59.69,49.28 JP12.1
VCC6
  Top 0.762: JP13.VBUS 92.4,48.97 92.71,49.28 JP14.1
VCC7
  Top 0.762: JP15.VBUS 125.42,48.97 125.73,49.28 JP16.1
VCC8
  Top 0.762: JP17.VBUS 26.36,74.87 26.67,75.18 JP18.1
VCC9
  Top 0.762: JP19.VBUS 59.38,74.87 59.69,75.18 JP20.1
VCC10
  Top 0.762: JP21.VBUS 92.4,74.87 92.71,75.18 JP22.1
VCC11
  Top 0.762: JP23.VBUS 125.42,74.87 125.73,75.18 JP24.1
VCC12
  Top 0.762: JP25.VBUS 26.36,100.78 26.67,101.09 JP26.1
VCC13
  Top 0.762: JP27.VBUS 59.38,100.78 59.69,101.09 JP28.1
VCC14
  Top 0.762: JP29.VBUS 92.4,100.78 92.71,101.09 JP30.1
VCC15
  Top 0.762: JP31.VBUS 125.42,100.78 125.73,101.09 JP32.1
VCC16
  Top 0.762: JP33.VBUS 26.36,126.69 26.67,127 JP34.1
VCC17
  Top 0.762: JP35.VBUS 59.38,126.69 59.69,127 JP36.1
VCC18
  Top 0.762: JP37.VBUS 92.4,126.69 92.71,127 JP38.1
VCC19
  Top 0.762: JP39.VBUS 125.42,126.69 125.73,127 JP40.1

## Text on the board
Bottom: v10 | v10 | v10 | v10 | v10 | v10 | v10 | v10 | v10 | v10 | v10 | v10 | v10 | v10 | v10 | v10 | v10 | v10 | v10 | v10
tPlace: VCC | VCC | VCC | VCC | D- | D- | D- | D- | D+ | D+ | D+ | D+ | GND | GND | GND | GND | VCC | VCC | VCC | VCC | D- | D- | D- | D- | D+ | D+ | D+ | D+ | GND | GND | GND | GND | VCC | VCC | VCC | VCC | D- | D- | D- | D- | D+ | D+ | D+ | D+ | GND | GND | GND | GND | VCC | VCC | VCC | VCC | D- | D- | D- | D- | D+ | D+ | D+ | D+ | GND | GND | GND | GND | VCC | VCC | VCC | VCC | D- | D- | D- | D- | D+ | D+ | D+ | D+ | GND | GND | GND | GND
bPlace: VCC | VCC | VCC | VCC | D- | D- | D- | D- | USB Type A Female | Breakout | USB Type A Female | Breakout | USB Type A Female | Breakout | USB Type A Female | Breakout | D+ | D+ | D+ | D+ | GND | GND | GND | GND | VCC | VCC | VCC | VCC | D- | D- | D- | D- | USB Type A Female | Breakout | USB Type A Female | Breakout | USB Type A Female | Breakout | USB Type A Female | Breakout | D+ | D+ | D+ | D+ | GND | GND | GND | GND | VCC | VCC | VCC | VCC | D- | D- | D- | D- | USB Type A Female | Breakout | USB Type A Female | Breakout | USB Type A Female | Breakout | USB Type A Female | Breakout | D+ | D+ | D+ | D+ | GND | GND | GND | GND | VCC | VCC | VCC | VCC | D- | D- | D- | D- | USB Type A Female | Breakout | USB Type A Female | Breakout | USB Type A Female | Breakout | USB Type A Female | Breakout | D+ | D+ | D+ | D+ | GND | GND | GND | GND | VCC | VCC | VCC | VCC | D- | D- | D- | D- | USB Type A Female | Breakout | USB Type A Female | Breakout | USB Type A Female | Breakout | USB Type A Female | Breakout | D+ | D+ | D+ | D+ | GND | GND | GND | GND